# Altium PCB ACDC.PcbDoc (part 1 of 2)
Units mil, origin at the board's own origin, x right, y up, seen from the top; angles counter-clockwise.
Board outline 4750 x 3251 mil, 4 copper layers (Top Layer, GND, 3V3, Bottom Layer), stack 23.756 mil thick; 141 components, 109 nets, 697 pads, 528 vias.
Unrouted connection lines stored in the file: 62.
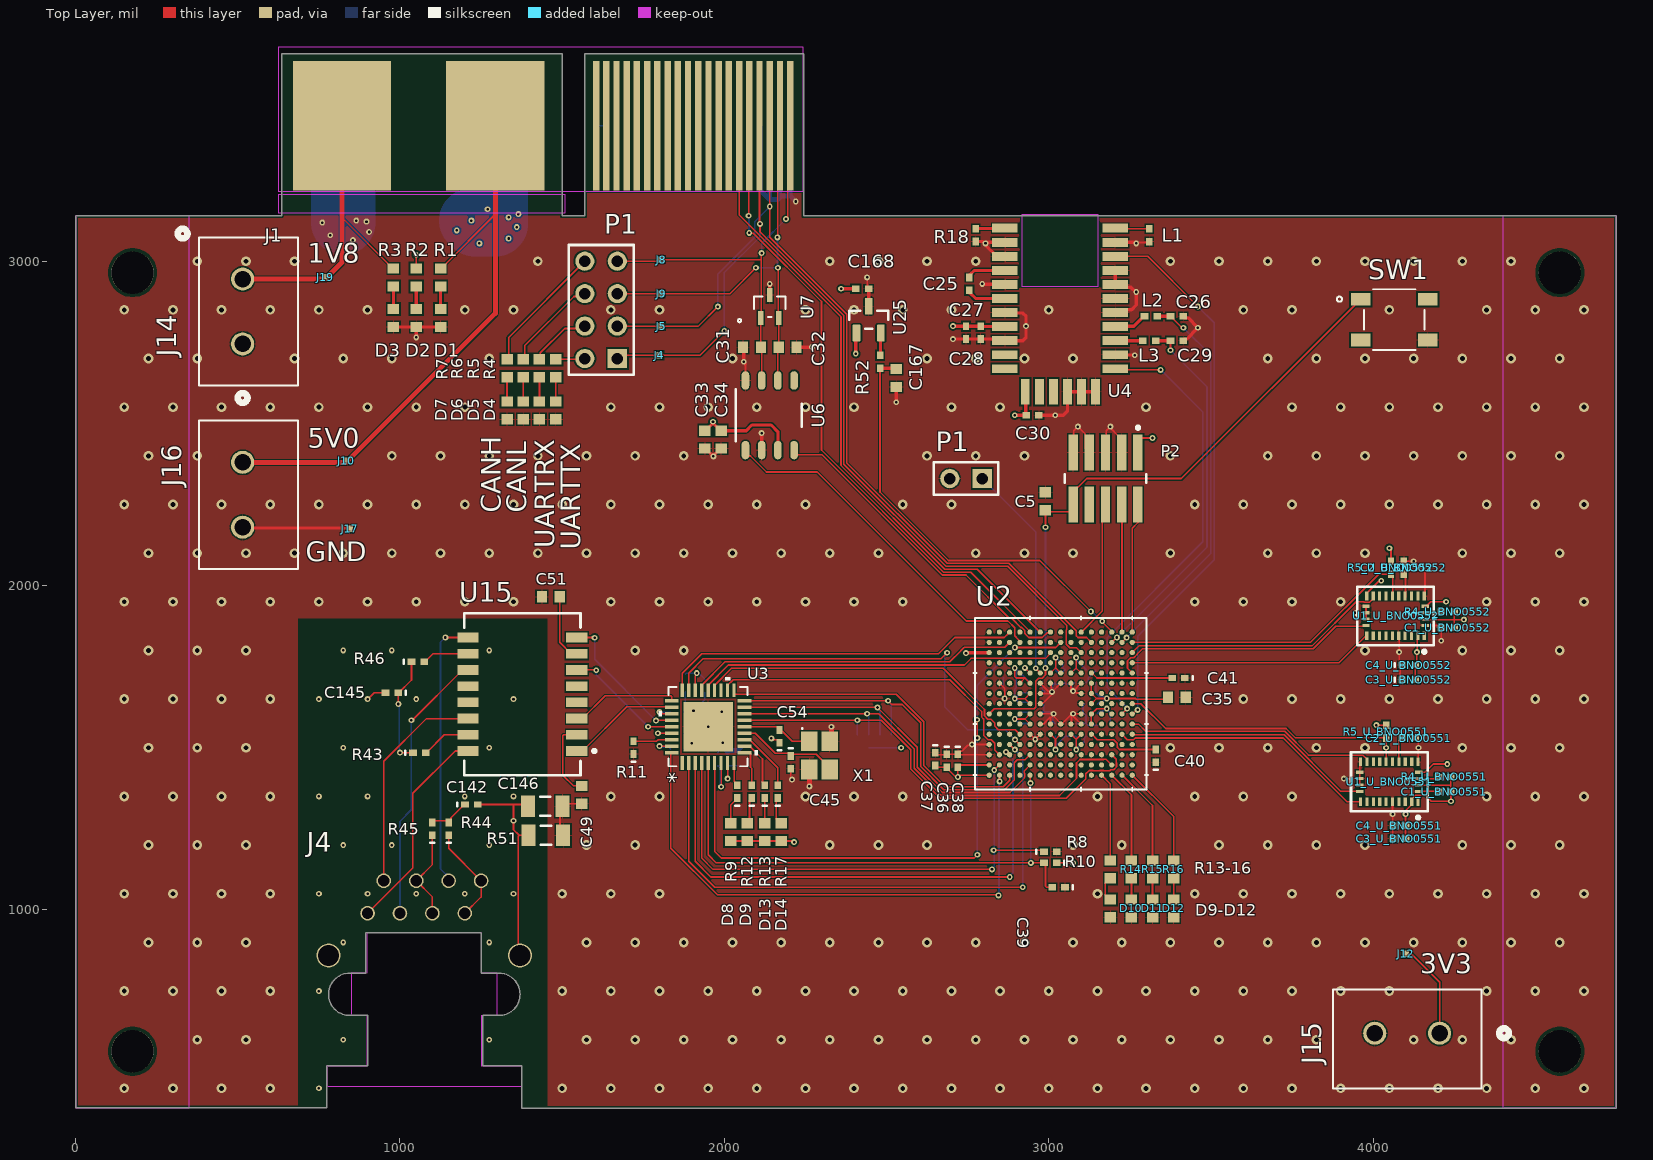
[diagram p0: Top Layer view]
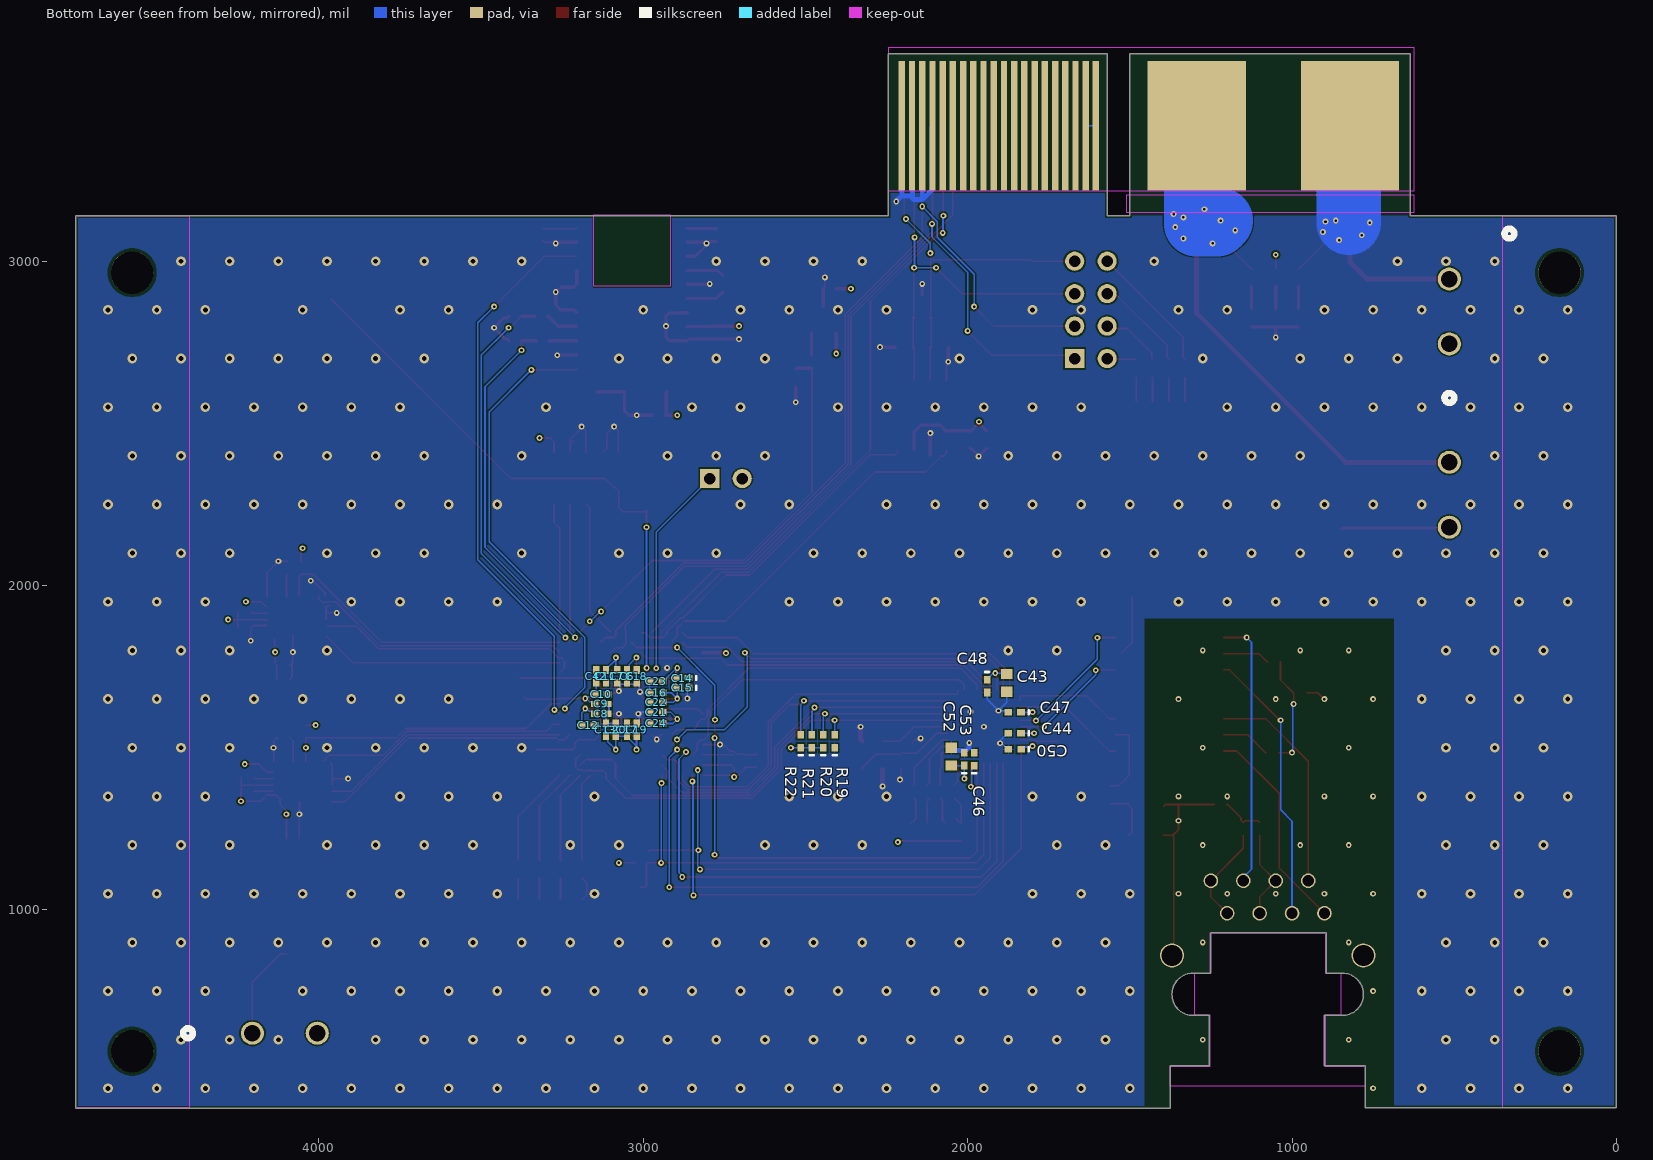
[diagram p1: Bottom Layer view, seen from below]
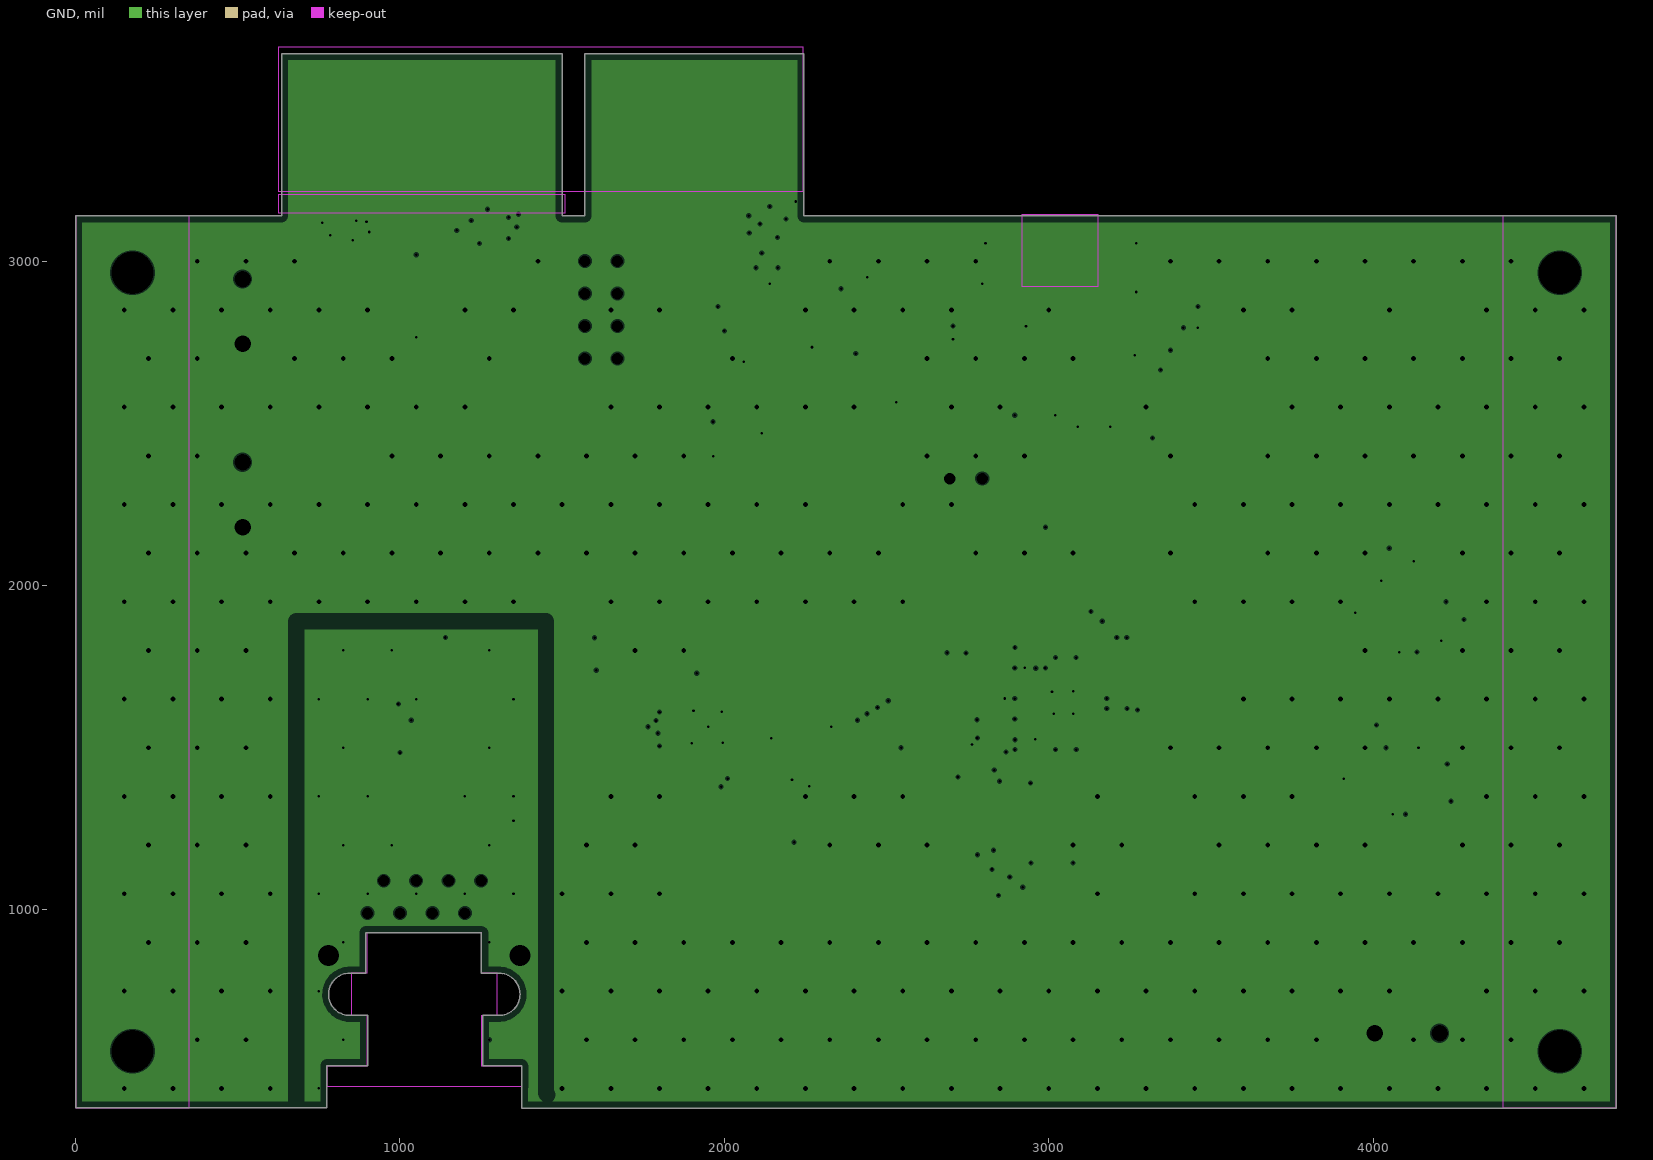
[diagram p2: GND, clearances drawn from the general rule]
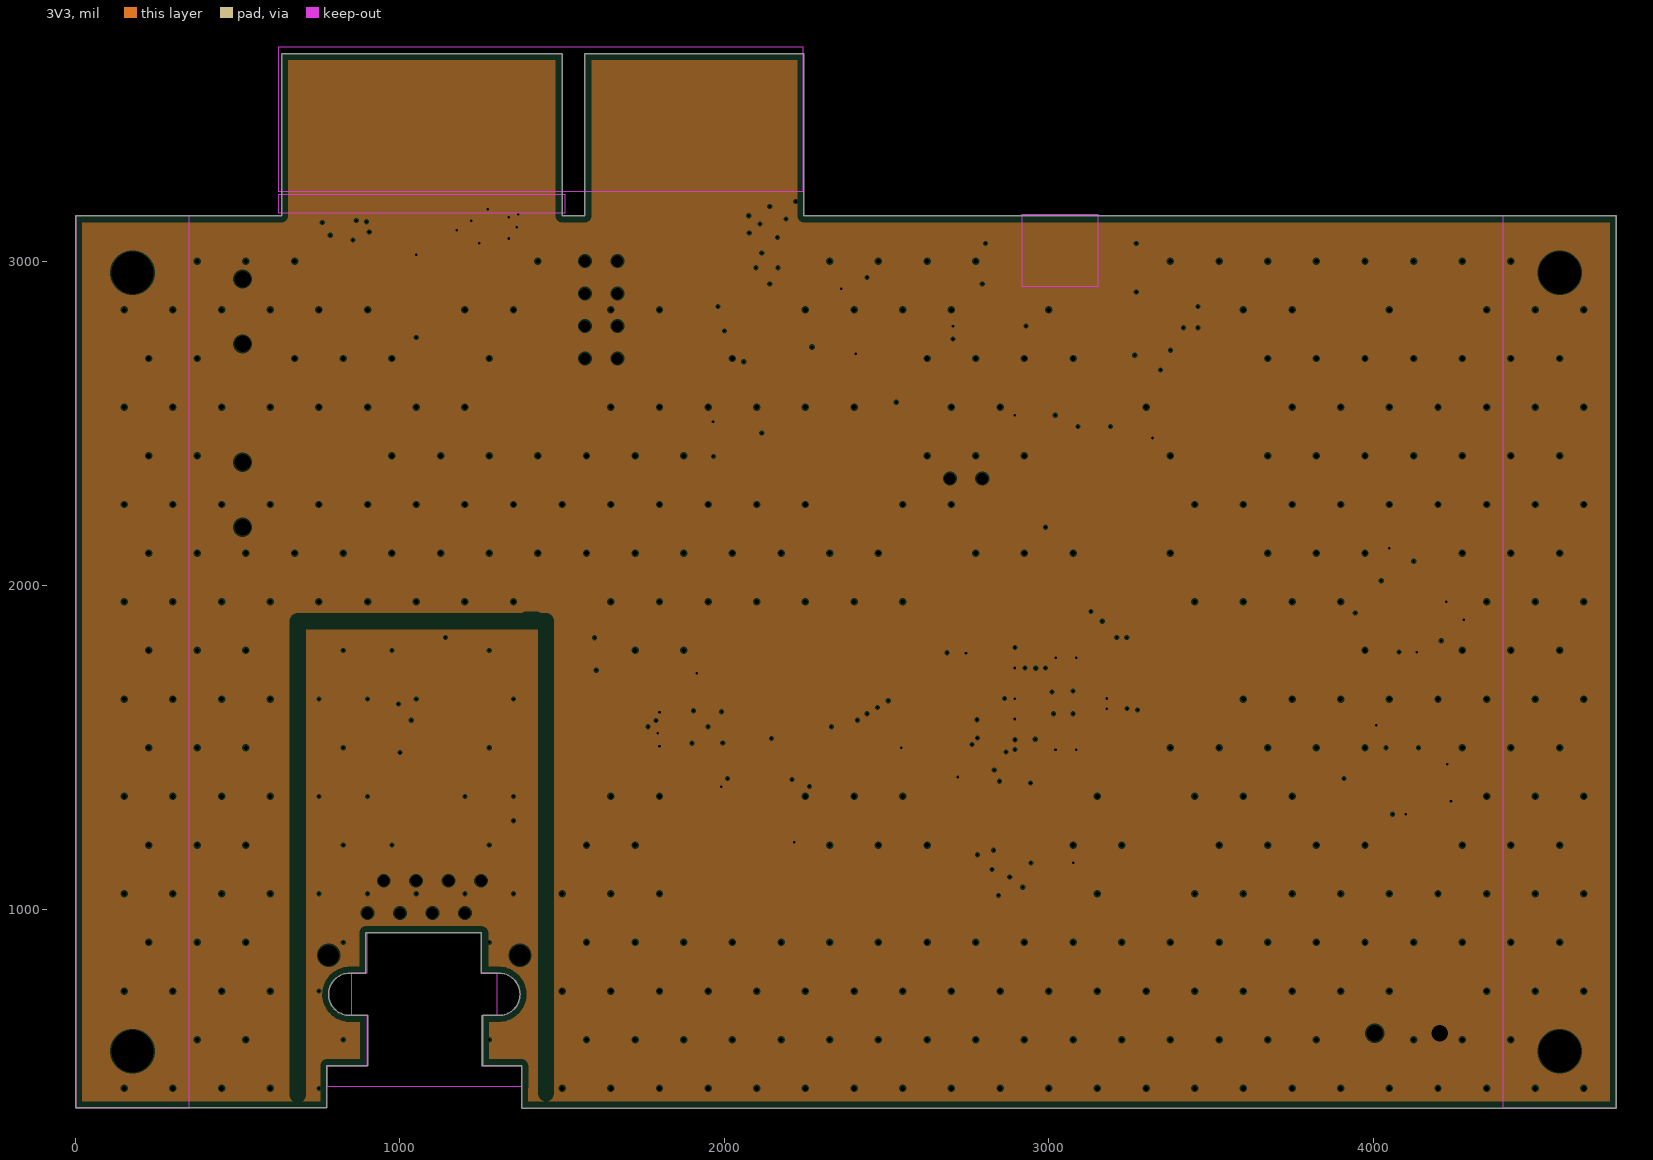
[diagram p3: 3V3, clearances drawn from the general rule]

## Layer stack, top to bottom
Top Solder: solder mask 0.4, Solder Resist, Dk 3.5
Top Layer: signal copper 1.4
Dielectric 2: prepreg 2.8, PP-006, Dk 4.1
GND: plane copper 1.378, net (Multiple Nets)
Dielectric 1: dielectric 12.6, FR-4, Dk 4.8
3V3: plane copper 1.378, net 3V3
Dielectric 3: prepreg 2.8, PP-006, Dk 4.1
Bottom Layer: signal copper 1.4
Bottom Solder: solder mask 0.4, Solder Resist, Dk 3.5

## Board outline
0,390 775,390 775,520 900,520 900,675 845,675 cw(c844.91,740.1) 850,805 895,805 895,930 1250,930 1250,805 1300,805 cw(c1305,740) 1300,675 1255,675 1255,520 1375,520 1375,390 1376,389 4749,389 4750,390 4750,3140 2245,3140 2245,3640 1570,3640 1570,3140 1500,3140 1500,3640 635,3640 635,3140 0,3140

## Design rules (kind name [scope] priority, off if disabled: settings)
BoardOutlineClearance [All] p1: gap=7.87 ignorepadtopadclearanceinfootprint=FALSE
Clearance [All] p1: gap=5 ignorepadtopadclearanceinfootprint=FALSE except(4: Arc-Arc Arc-Track Arc-SMDPad Arc-THPad Arc-Fill Arc-Poly Arc-Region Arc-Text Track-Track Track-SMDPad Track-THPad Track-Fill Track-Poly Track-Region Track-Text SMDPad-Text THPad-Text Fill-Text Poly-Text Region-Text Text-Text; 9.84: Arc-Hole Track-Hole SMDPad-Hole THPad-Hole Via-Hole Fill-Hole Poly-Hole Region-Hole Text-Hole)
ComponentClearance [All] p1: gap=4 collisioncheckmode=3 verticalgap=4 showdistances=TRUE
DiffPairsRouting [All] p1: maxlimit=4 minlimit=4 mostfreqgap=4 substack1={5B3CBE88-527F-45CC-934D-B3D730501180} toplayer_{5b3cbe88-527f-45cc-934d-b3d730501180}_minwidth=15 toplayer_{5b3cbe88-527f-45cc-934d-b3d730501180}_maxwidth=15 toplayer_{5b3cbe88-527f-45cc-934d-b3d730501180}_prefwidth=15 bottomlayer_{5b3cbe88-527f-45cc-934d-b3d730501180}_minwidth=15 bottomlayer_{5b3cbe88-527f-45cc-934d-b3d730501180}_maxwidth=15 bottomlayer_{5b3cbe88-527f-45cc-934d-b3d730501180}_prefwidth=15 toplayer_minwidth=4 toplayer_maxwidth=71497.94 toplayer_prefwidth=4 bottomlayer_minwidth=4 bottomlayer_maxwidth=71497.94 bottomlayer_prefwidth=4 substack2={8099F0E5-E8A4-4C0B-B981-DA392BF8B1DC} toplayer_{8099f0e5-e8a4-4c0b-b981-da392bf8b1dc}_minwidth=15 toplayer_{8099f0e5-e8a4-4c0b-b981-da392bf8b1dc}_maxwidth=15 toplayer_{8099f0e5-e8a4-4c0b-b981-da392bf8b1dc}_prefwidth=15 bottomlayer_{8099f0e5-e8a4-4c0b-b981-da392bf8b1dc}_minwidth=15 bottomlayer_{8099f0e5-e8a4-4c0b-b981-da392bf8b1dc}_maxwidth=15 bottomlayer_{8099f0e5-e8a4-4c0b-b981-da392bf8b1dc}_prefwidth=15 substack3={670BDCB0-0926-4304-8001-FDB9BD357462} toplayer_{670bdcb0-0926-4304-8001-fdb9bd357462}_minwidth=15 toplayer_{670bdcb0-0926-4304-8001-fdb9bd357462}_maxwidth=15 toplayer_{670bdcb0-0926-4304-8001-fdb9bd357462}_prefwidth=15 bottomlayer_{670bdcb0-0926-4304-8001-fdb9bd357462}_minwidth=15 bottomlayer_{670bdcb0-0926-4304-8001-fdb9bd357462}_maxwidth=15 bottomlayer_{670bdcb0-0926-4304-8001-fdb9bd357462}_prefwidth=15 substack4={A201DB0F-6F31-4885-A301-8523EAE111D3} toplayer_{a201db0f-6f31-4885-a301-8523eae111d3}_minwidth=15 toplayer_{a201db0f-6f31-4885-a301-8523eae111d3}_maxwidth=15 toplayer_{a201db0f-6f31-4885-a301-8523eae111d3}_prefwidth=15 bottomlayer_{a201db0f-6f31-4885-a301-8523eae111d3}_minwidth=15 bottomlayer_{a201db0f-6f31-4885-a301-8523eae111d3}_maxwidth=15 bottomlayer_{a201db0f-6f31-4885-a301-8523eae111d3}_prefwidth=15 maxuncoupledlength=500
Height [All] p1: minheight=0 maxheight=71497.94 prefheight=500
HoleSize [All] p1: absolutevalues=TRUE maxlimit=248.03 minlimit=7.87 maxpercent=80.000 minpercent=20.000
HoleToHoleClearance [All] p1: gap=9.84 allowstackedmicrovias=FALSE
MinimumAnnularRing [All] p1: minimumring=3
MinimumSolderMaskSliver [All] p1: minsoldermaskwidth=0
PlaneClearance [All] p1: clearance=4
PlaneConnect PlaneConnectPowerPads [InPadClass('PowerPads')] p1: planeconnectstyle=Direct reliefexpansion=20 reliefentries=4 reliefconductorwidth=10 reliefairgap=10
PlaneConnect [All] p2: pad.planeconnectstyle=Relief pad.reliefexpansion=11.81 pad.reliefentries=4 pad.reliefconductorwidth=4 pad.reliefairgap=4 via.planeconnectstyle=Direct via.reliefexpansion=11.81 via.reliefentries=4 via.reliefconductorwidth=5 via.reliefairgap=5
PolygonConnect PolygonConnectPowerPads [All vs (InPadClass('PowerPads'))] p1: connectstyle=Direct reliefconductorwidth=10 reliefentries=4 polygonreliefangle="90 Angle" airgapwidth=10
PolygonConnect [All] p2: thpad.connectstyle=Relief thpad.reliefconductorwidth=4 thpad.reliefentries=4 thpad.polygonreliefangle="90 Angle" thpad.airgapwidth=4 smdpad.connectstyle=Relief smdpad.reliefconductorwidth=4 smdpad.reliefentries=4 smdpad.polygonreliefangle="90 Angle" smdpad.airgapwidth=4 via.connectstyle=Direct via.reliefconductorwidth=5 via.reliefentries=4 via.polygonreliefangle="90 Angle" via.airgapwidth=5
RoutingVias [All] p1: holewidth=7.87 width=17.72 viastyle="Through Hole" minholewidth=7.87 minwidth=17.72 maxholewidth=248.03 maxwidth=257.87
SilkToSilkClearance [All] p1: silktosilkclearance=0
SilkToSolderMaskClearance [IsPad] p1: minsilkscreentomaskgap=4 clearancetoexposedcopper=TRUE
SolderMaskExpansion [All] p1: expansion=2.95 istentingtop=FALSE
Width [All] p1: maxlimit=71497.94 minlimit=4 preferedwidth=4 substack1={5B3CBE88-527F-45CC-934D-B3D730501180} substack2={8099F0E5-E8A4-4C0B-B981-DA392BF8B1DC} substack3={670BDCB0-0926-4304-8001-FDB9BD357462} substack4={A201DB0F-6F31-4885-A301-8523EAE111D3}
20 further rules are at their usual default settings.

## Classes and differential pairs
net class TXD[3..0]: TXD0 TXD1 TXD2 TXD3
net class RXD[3..0]: RXD0 RXD1 RXD2 RXD3
channel class BNO055: U_BNO0551 U_BNO0552
component class U_BNO0552: C1_U_BNO0552 C2_U_BNO0552 C3_U_BNO0552 C4_U_BNO0552 R4_U_BNO0552 R5_U_BNO0552 U1_U_BNO0552
component class U_BNO0551: C1_U_BNO0551 C2_U_BNO0551 C3_U_BNO0551 C4_U_BNO0551 R4_U_BNO0551 R5_U_BNO0551 U1_U_BNO0551
component class Designator: C5 C6 C7 C8 C9 C10 C11 C12 C13 C14 C15 C16 C17 C18 C19 C20 C21 C22 C23 C24 C35 C36 C37 C38 C40 C41 C42 D9-D12 D10 D11 D12 P1 P2 R13-16 R14 R15 R16 SW1 U2

## Components (designator, comment, footprint, x,y, rotation, side; value= is the part's Value field where it differs from the comment)
C1_U_BNO0551 "Cap" 0402-A 4220,1365 r0 top value=100nF (schematic designator C1)
C1_U_BNO0552 "Cap" 0402-A 4230,1870 r0 top value=100nF (schematic designator C1)
C2_U_BNO0551 "Cap" 0402-A 4110,1530 r180 top value=100nF (schematic designator C2)
C2_U_BNO0552 "Cap" 0402-A 4095,2055 r270 top value=100nF (schematic designator C2)
C3_U_BNO0551 "Cap" 0402-A 4080,1220 r0 top value=100nF (schematic designator C3)
C3_U_BNO0552 "Cap" 0402-A 4110,1710 r0 top value=100nF (schematic designator C3)
C4_U_BNO0551 "Cap" 0402-A 4080,1260 r0 top value=6.8nF (schematic designator C4)
C4_U_BNO0552 "Cap" 0402-A 4110,1755 r0 top value=6.8nF (schematic designator C4)
C5 "Cap" 1608[0603] 2990,2260 r270 top value=100nF
C6 "Cap" 0402-A 3050,1720 r90 bottom value=100nF
C7 "Cap" 0402-A 3080,1720 r90 bottom value=100nF
C8 "Cap" 0402-A 3129.68,1605 r0 bottom value=100nF
C9 "Cap" 0402-A 3130,1635 r0 bottom value=100nF
C10 "Cap" 0402-A 3130,1665 r0 bottom value=100nF
C11 "Cap" 0402-A 3115,1720 r90 bottom value=100nF
C12 "Cap" 0402-A 3170,1570 r0 bottom value=100nF
C13 "Cap" 0402-A 3115,1555 r270 bottom value=100nF
C14 "Cap" 0402-A 2880.31,1715 r0 bottom value=100nF
C15 "Cap" 0402-A 2879.68,1685 r0 bottom value=100nF
C16 "Cap" 0402-A 2960,1670 r180 bottom value=100nF
C17 "Cap" 0402-A 3050,1555.32 r270 bottom value=100nF
C18 "Cap" 0402-A 3020,1720 r90 bottom value=100nF
C19 "Cap" 0402-A 3020,1555 r270 bottom value=100nF
C20 "Cap" 0402-A 3085,1555.32 r270 bottom value=100nF
C21 "Cap" 0402-A 2960,1610 r180 bottom value=100nF
C22 "Cap" 0402-A 2960,1640 r180 bottom value=100nF
C23 "Cap" 0402-A 2960.32,1705 r180 bottom value=100nF
C24 "Cap" 0402-A 2960,1575 r180 bottom value=100nF
C25 "Cap" 0402-A 2755,2930 r90 top value=22pF
C26 "Cap" 0402-A 3395,2830 r180 top value=22pF
C27 "Cap" 0402-A 2745,2780 r90 top value=22pF
C28 "Cap" 0402-A 2790,2780 r90 top value=2.2uF
C29 "Cap" 0402-A 3395,2755 r180 top value=22pF
C30 "Cap" 0402-A 2950,2525 r180 top value=22pF
C31 "Cap" 1608[0603] 2085,2735 r0 top value=100nF
C32 "Cap" 1608[0603] 2195,2735 r180 top value=100nF
C33 "Cap" 1608[0603] 1940,2450 r270 top value=100nF
C34 "Cap" 1608[0603] 1990,2450 r90 top value=1nF
C35 "Cap" 1608[0603] 3395,1655 r180 top value=4.7uF
C36 "Cap" 0402-A 2685,1460 r270 top value=100nF
C37 "Cap" 0402-A 2650,1465 r270 top value=1uF
C38 "Cap" 0402-A 2720,1460 r270 top value=100nF
C39 "Cap" 0402-A 3030.63,1070 r180 top value=100nF
C40 "Cap" 0402-A 3330,1475 r90 top value=2.2uF
C41 "Cap" 0402-A 3400,1715 r180 top value=2.2uF
C42 "Cap" 0402-A 3145,1720 r270 bottom value=100nF
C43 "Cap" 1608[0603] 1880,1700 r270 bottom value=4.7uF
C44 "Cap" 0402-A 1855,1545 r0 bottom value=100nF
C45 "Cap" 0402-A 2205,1455 r270 top value=33pF
C46 "Cap" 0402-A 1980,1464.68 r90 bottom value=100nF
C47 "Cap" 0402-A 1855,1610 r0 bottom value=100nF
C48 "Cap" 0402-A 1940,1690.32 r270 bottom value=100nF
C49 "Cap" 1608[0603] 1560,1355 r270 top value=100nF
C50 "Cap" 0402-A 1854.68,1495 r0 bottom value=100nF
C51 "Cap" 1608[0603] 1465,1965 r180 top value=100nF
C52 "Cap" 1608[0603] 2050,1472.56 r90 bottom value=4.7uF
C53 "Cap" 0402-A 2010,1465 r90 bottom value=100nF
C54 "Cap" 0402-A 2170,1535.31 r90 top value=33pF
C142 "Cap" 0402-A 1220,1325 r0 top value=10nF
C145 "Cap" 0402-A 975,1670 r180 top value=1nF
C146 "Cap" C1206 1448.15,1320 r180 top value=4.7nF
C167 "Cap" 1608[0603] 2530,2640 r270 top value=680pF
C168 "Cap" 0402-A 2425,2915 r0 top value=100nF
D1 "LED0" 1608[0603] 1125,2825 r270 top
D2 "LED0" 1608[0603] 1050,2825 r270 top
D3 "LED0" 1608[0603] 980,2825 r270 top
D4 "LED0" 1608[0603] 1480,2540 r270 top
D5 "LED0" 1608[0603] 1430,2540 r270 top
D6 "LED0" 1608[0603] 1380,2540 r270 top
D7 "LED0" 1608[0603] 1330,2540 r270 top
D8 "LED0" 1608[0603] 2020,1240 r90 top
D9 "LED0" 1608[0603] 2070,1240 r90 top
D9-D12 "LED0" 1608[0603] 3190,1005 r270 top
D10 "LED0" 1608[0603] 3255,1005 r270 top
D11 "LED0" 1608[0603] 3320,1005 r270 top
D12 "LED0" 1608[0603] 3385,1005 r270 top
D13 "LED0" 1608[0603] 2125,1240 r90 top
D14 "LED0" 1608[0603] 2175,1240 r90 top
J1 "HSEC8-120-01-L-PV-4-1" "HSEC8-120-01-L-PV-4-1 Gold Fingers" 1450,3435 r0 top
J4 "5029" "EXPOSED PAD 0.02X0.02" 1800,2710 r0 top
J4 "RJULE4218201" RJULE4218201 1075,740 r0 top locked
J5 "5029" "EXPOSED PAD 0.02X0.02" 1805,2800 r0 top
J8 "5029" "EXPOSED PAD 0.02X0.02" 1805,3005 r0 top
J9 "5029" "EXPOSED PAD 0.02X0.02" 1805,2900 r0 top
J10 "5029" "EXPOSED PAD 0.02X0.02" 835,2385 r90 top
J12 "5029" "EXPOSED PAD 0.02X0.02" 4100,865 r90 top
J14 "OSTTC022162" CONN_OSTTC022162_OST 515,2945 r270 top
J15 "OSTTC022162" CONN_OSTTC022162_OST 4205,620 r180 top
J16 "OSTTC022162" CONN_OSTTC022162_OST 515,2380 r270 top
J17 "5029" "EXPOSED PAD 0.02X0.02" 845,2175 r90 top
J19 "5029" "EXPOSED PAD 0.02X0.02" 770,2950 r90 top
L1 "Inductor" 0402-A 3310,3080 r270 top value=1.8nH
L2 "Inductor" 0402-A 3315,2830 r0 top value=47nH
L3 "Inductor" 0402-A 3310,2755 r0 top value=47nH
P1 "Header 4X2" HDR2X4 1670,2700 r90 top
P1 "Header 2" HDR1X2 2795,2330 r180 top
P2 "SWD" SMTC-FTSH-105-01-L-DV-K_V 3175,2330.12 r180 top locked
R1 "Res1" 1608[0603] 1125,2950 r90 top value=470
R2 "Res1" 1608[0603] 1050,2950 r90 top value=470
R3 "Res1" 1608[0603] 980,2950 r90 top value=470
R4 "Res1" 1608[0603] 1480,2670 r90 top value=470
R4_U_BNO0551 "Res1" 0402-A 4220,1410 r180 top value=10k (schematic designator R4)
R4_U_BNO0552 "Res1" 0402-A 4230,1920 r180 top value=10k (schematic designator R4)
R5 "Res1" 1608[0603] 1430,2670 r90 top value=470
R5_U_BNO0551 "Res1" 0402-A 4040,1550 r90 top value=10k (schematic designator R5)
R5_U_BNO0552 "Res1" 0402-A 4055,2055 r90 top value=10k (schematic designator R5)
R6 "Res1" 1608[0603] 1380,2670 r90 top value=470
R7 "Res1" 1608[0603] 1330,2670 r90 top value=470
R8 "Res1" 0402-A 3005.31,1180 r0 top value=1k
R9 "Res1" 0402-A 2040,1365 r90 top value=220
R10 "Res1" 0402-A 3005,1145 r180 top value=10k
R11 "Res1" 0402-A 1720,1500.31 r90 top value=12.4k
R12 "Res1" 0402-A 2085,1365 r90 top value=220
R13 "Res1" 0402-A 2125,1365 r90 top value=220
R13-16 "Res1" 1608[0603] 3190,1125 r90 top value=470
R14 "Res1" 1608[0603] 3255,1125 r90 top value=470
R15 "Res1" 1608[0603] 3320,1125 r90 top value=470
R16 "Res1" 1608[0603] 3385,1125 r90 top value=470
R17 "Res1" 0402-A 2165,1365 r90 top value=220
R18 "Res1" 0402-A 2775,3080.31 r90 top value=0
R19 "Res1" 0402-A 2410,1520 r90 bottom value=10k
R20 "Res1" 0402-A 2445,1520 r90 bottom value=10k
R21 "Res1" 0402-A 2480,1520 r90 bottom value=10k
R22 "Res1" 0402-A 2515,1520 r90 bottom value=10k
R43 "Res1" 0402-A 1060,1485 r0 top value=75
R44 "Res1" 0402-A 1150,1250 r90 top value=75
R45 "Res1" 0402-A 1100,1250 r90 top value=75
R46 "Res1" 0402-A 1055.31,1765 r0 top value=75
R51 "Res1" C1206 1450,1230 r0 top value=1M
R52 "Res1" 0402-A 2480,2690 r270 top value=0
SW1 "PTS647SK38SMTR2LFS" PTS647SK38SMTR2LFS_CNK 4065,2820 r0 top
U1_U_BNO0551 "BNO055" FP-BNO055-MFG 4050,1395 r270 top (schematic designator U1)
U1_U_BNO0552 "BNO055" FP-BNO055-MFG 4069.21,1906.52 r270 top (schematic designator U1)
U2 "STM32F750N8H6" TFBGA216_13X13_STM 3037.01,1635.98 r0 top locked
U3 "LAN8700C-AEZG-TR" QFN36_6X6MC_MCH 1950,1565 r90 top locked
U4 "M20048-1" M20048-1 2927.6,2597.52 r0 top locked
U6 "TCAN334DR" D0008A_N 2140,2525 r90 top value=Value
U7 "D5V0L2B3W-7" SOT-323_DIO 2140,2860 r0 top
U15 "HX1188FNL" PULS-HX1188FNL-SMT-16_V 1377.52,1665 r90 top locked
U25 "TMP235AQDBZTQ1" FP-DBZ0003A-MFG 2445,2820 r90 top
X1 "25M20P2/XT324-10/10" 25M20P2/XT324-10/10 2293.5,1476.69 r270 top

## Footprints (in the part's own frame and the unit in brackets; to place one, negate y for a bottom-side part, rotate by r counter-clockwise, add the part's x,y. Pads: shape width x height; smd on the part's side, far side on the other; paste and mask are expansions set on the pad)
25M20P2/XT324-10/10 [mm] "DFN, 4-Leads, Body 3.20x2.50mm, Pitch 1.60mm, IPC Medium Density"
  rect 1.55x1.3 smd: 1(-1.1,-0.8) 2(1.1,-0.8) 3(1.1,0.8) 4(-1.1,0.8)
  silkscreen extent -2.15,-1.4 -2.05,-1.3, body extent -1.7,-1.35 1.7,1.35, height 0.7
0402-A [mm] "Chip Inductor, Body 1.0x0.5mm, IPC High Density"
  rect 0.6x0.5 smd: 1(-0.5,0) 2(0.5,0)
  body extent -0.55,-0.3 0.55,0.3, height 0.55
1608[0603] [mm] "Chip Capacitor, Body 1.6x0.8mm, IPC High Density"
  rect 0.8x0.9 smd: 1(-0.7,0) 2(0.7,0)
  body extent -0.87,-0.48 0.87,0.48, height 1.3
C1206 [mm] "Chip Capacitor, Body 3.2x1.6mm, IPC High Density"
  rect 1.1x1.7 smd: 1(-1.35,0) 2(1.35,0)
  silkscreen extent -0.4,-0.75 0.4,0.75, body extent -1.7,-0.9 1.7,0.9, height 1.3
CONN_OSTTC022162_OST [mil]
  round 71 hole 51 mask+0: 1(0,0) 2(200,0)
  silkscreen extent -155,-200 328,170, body extent 0,0 10,10, height 10
D0008A_N [mm]
  oval 1.45x0.6 smd paste+0 mask+0.051: 1(-2.725,1.905) 2(-2.725,0.635) 3(-2.725,-0.635) 4(-2.725,-1.905) 5(2.725,-1.905) 6(2.725,-0.635) 7(2.725,0.635) 8(2.725,1.905)
  silkscreen extent -2.04,-2.5 2.03,2.67, body extent 0,0 0.25,0.25, height 0.25
"EXPOSED PAD 0.02X0.02" [mil]
  rect 20x20 smd: 1(0,0)
FP-BNO055-MFG [mm]
  rect 0.675x0.25 smd paste+0 mask+0: 1(1.562,2.25) 6(-1.562,2.25) 7(-1.562,1.75) 8(-1.562,1.25) 9(-1.562,0.75) 10(-1.562,0.25) 11(-1.562,-0.25) 12(-1.562,-0.75) 13(-1.562,-1.25) 14(-1.562,-1.75) 15(-1.562,-2.25) 20(1.562,-2.25) 21(1.562,-1.75) 22(1.562,-1.25) 23(1.562,-0.75) 24(1.562,-0.25) 25(1.562,0.25) 26(1.562,0.75) 27(1.562,1.25) 28(1.562,1.75)
  rect 0.25x0.575 smd paste+0 mask+0: 2(0.75,2.312) 3(0.25,2.312) 4(-0.25,2.312) 5(-0.75,2.312) 16(-0.75,-2.312) 17(-0.25,-2.312) 18(0.25,-2.312) 19(0.75,-2.312)
  silkscreen extent -2.3,-3 2.92,3
FP-DBZ0003A-MFG [mm]
  rrect17% 1.3x0.6 smd paste+0 mask+0: 1(-1.05,0.95) 2(-1.05,-0.95) 3(1.05,0)
  silkscreen extent -0.7,-1.52 0.7,1.52, body extent -1.8,-1.62 1.8,1.62, height 0.25
HDR1X2 [mm] "Connector; Header; 2 Position"
  rect 1.5x1.5 hole 0.9: 1(0,0)
  round 1.5 hole 0.9: 2(2.54,0)
  silkscreen extent -1.27,-1.27 3.81,1.27
HDR2X4 [mm] "Connector; Header; 4x2 Position"
  rect 1.5x1.5 hole 0.9: 1(0,0)
  round 1.5 hole 0.9: 2(0,2.54) 3(2.54,0) 4(2.54,2.54) 5(5.08,0) 6(5.08,2.54) 7(7.62,0) 8(7.62,2.54)
  silkscreen extent -1.27,-1.27 8.89,3.81
"HSEC8-120-01-L-PV-4-1 Gold Fingers" [mil]
  rect 303x400 smd paste-400: 0(-629,-17.25) 1(-156,-17.25)
  rect 19.68x400 smd paste-400: 2(154.5,-17.25) 3(186,-17.25) 4(217.5,-17.25) 5(249,-17.25) 6(280.5,-17.25) 7(312,-17.25) 8(343.5,-17.25) 9(375,-17.25) 10(406.5,-17.25) 11(438,-17.25) 12(469.5,-17.25) 13(501,-17.25) 14(532.5,-17.25) 15(564,-17.25) 16(595.5,-17.25) 17(627,-17.25) 18(658.5,-17.25) 19(690,-17.25) 20(721.5,-17.25) 21(753,-17.25)
  rect 303x400 smd far side paste-400: 22(-629,-17.25) 23(-156,-17.25)
  rect 19.68x400 smd far side paste-400: 24(154.5,-17.25) 25(186,-17.25) 26(217.5,-17.25) 27(249,-17.25) 28(280.5,-17.25) 29(312,-17.25) 30(343.5,-17.25) 31(375,-17.25) 32(406.5,-17.25) 33(438,-17.25) 34(469.5,-17.25) 35(501,-17.25) 36(532.5,-17.25) 37(564,-17.25) 38(595.5,-17.25) 39(627,-17.25) 40(658.5,-17.25) 41(690,-17.25) 42(721.5,-17.25) 43(753,-17.25)
  Keep-Out Layer region: -825,-220 792.61,-220 792.61,225 -825,225
  Keep-Out Layer region: -825,-285 60,-285 60,-230 -825,-230
M20048-1 [mm]
  rect 2x0.7 smd: 1(-1.59,12.806) 2(-1.59,11.704) 3(-1.59,10.604) 4(-1.59,9.504) 5(-1.59,8.4) 6(-1.59,7.302) 7(-1.59,6.202) 8(-1.59,5.1) 9(-1.59,4) 10(-1.59,2.9) 11(-1.59,1.8) 18(7.05,1.8) 19(7.05,2.9) 20(7.05,4) 21(7.05,5.1) 22(7.05,6.202) 23(7.05,7.302) 24(7.05,8.4) 25(7.05,9.504) 26(7.05,10.604) 27(7.05,11.704) 28(7.05,12.806)
  rect 0.7x2 smd: 12(0,0) 13(1.1,0) 14(2.2,0) 15(3.3,0) 16(4.4,0) 17(5.5,0)
  Keep-Out Layer region: -0.285,8.255 5.715,8.255 5.715,13.843 -0.285,13.843
PTS647SK38SMTR2LFS_CNK [mil]
  rect 61x39 smd paste+0 mask+0: 1(-103.35,62.99) 2(103.35,62.99) 3(-103.35,-62.99) 4(103.35,-62.99)
  silkscreen extent -177,-94 94,94, body extent 0,0 10,10, height 10
PULS-HX1188FNL-SMT-16_V [mm] "SMD, 16-Leads, Body 12.7x9.09mm, Pitch 1.27mm"
  rect 0.76x1.65 smd: 1(-4.445,-4.255) 2(-3.175,-4.255) 3(-1.905,-4.255) 4(-0.635,-4.255) 5(0.635,-4.255) 6(1.905,-4.255) 7(3.175,-4.255) 8(4.445,-4.255) 9(4.445,4.255) 10(3.175,4.255) 11(1.905,4.255) 12(0.635,4.255) 13(-0.635,4.255) 14(-1.905,4.255) 15(-3.175,4.255) 16(-4.445,4.255)
  silkscreen extent -6.35,-5.75 6.35,4.54, body extent -6.35,-4.54 6.35,4.54, height 5.99
QFN36_6X6MC_MCH [mil]
  rect 42x10 smd paste+0 mask+0: 1(-112,80) 2(-112,60) 3(-112,40) 4(-112,20) 5(-112,0) 6(-112,-20) 7(-112,-40) 8(-112,-60) 9(-112,-80) 19(112,-80) 20(112,-60) 21(112,-40) 22(112,-20) 23(112,0) 24(112,20) 25(112,40) 26(112,60) 27(112,80)
  rect 10x42 smd paste+0 mask+0: 10(-80,-112) 11(-60,-112) 12(-40,-112) 13(-20,-112) 14(0,-112) 15(20,-112) 16(40,-112) 17(60,-112) 18(80,-112) 28(80,112) 29(60,112) 30(40,112) 31(20,112) 32(0,112) 33(-20,112) 34(-40,112) 35(-60,112) 36(-80,112)
  rect 152x152 smd paste-75.5 mask-75.5: 37(0,0)
  silkscreen extent -122,-153 153,153, body extent 0,0 10,10, height 10
RJULE4218201 [mil]
  round 45 hole 35: 1(-175,250) 2(-125,350) 3(-75,250) 4(-25,350) 5(25,250) 6(75,350) 7(125,250) 8(175,350)
  round 74 hole 64: 9(-295,120) 10(295,120)
  round 74 on Mech7: 11(-225,0) 11(225,0)
  Keep-Out Layer board cut-out: -177.5,189 -177.5,65 -225,65 -225,-65 -177.5,-65 -177.5,-222 -300.5,-222 -300.5,-284 300.5,-284 300.5,-222 177.5,-222 177.5,-65 225,-65 225,65 177.5,65 177.5,189
  body extent -372,-348 372,410, height 376
SMTC-FTSH-105-01-L-DV-K_V [mm] "CONN, 10-Leads, Body 6.35x3.43mm, Pitch 1.27mm"
  rect 0.74x2.79 smd: 1(-2.54,-2.035) 2(-2.54,2.035) 3(-1.27,-2.035) 4(-1.27,2.035) 5(0,-2.035) 6(0,2.035) 7(1.27,-2.035) 8(1.27,2.035) 9(2.54,-2.035) 10(2.54,2.035)
  silkscreen extent -3.17,-4.1 3.17,0.34, body extent -3.17,-2.92 3.18,2.92, height 6.12
SOT-323_DIO [mm]
  rect 0.451x1.111 smd paste+0 mask+0: 1(-0.7,-0.9) 2(0.7,-0.9) 3(0,0.9)
  silkscreen extent -2.5,-1.23 1.23,0.8, body extent 0,0 0.25,0.25, height 0.25
TFBGA216_13X13_STM [mil]
  round 16 smd paste+0 mask+0: A1(-220.47,220.47) A2(-188.98,220.47) A3(-157.48,220.47) A4(-125.98,220.47) A5(-94.49,220.47) A6(-62.99,220.47) A7(-31.5,220.47) A8(0,220.47) A9(31.5,220.47) A10(62.99,220.47) A11(94.49,220.47) A12(125.98,220.47) A13(157.48,220.47) A14(188.98,220.47) A15(220.47,220.47) B1(-220.47,188.98) B2(-188.98,188.98) B3(-157.48,188.98) B4(-125.98,188.98) B5(-94.49,188.98) B6(-62.99,188.98) B7(-31.5,188.98) B8(0,188.98) B9(31.5,188.98) B10(62.99,188.98) B11(94.49,188.98) B12(125.98,188.98) B13(157.48,188.98) B14(188.98,188.98) B15(220.47,188.98) C1(-220.47,157.48) C2(-188.98,157.48) C3(-157.48,157.48) C4(-125.98,157.48) C5(-94.49,157.48) C6(-62.99,157.48) C7(-31.5,157.48) C8(0,157.48) C9(31.5,157.48) C10(62.99,157.48) C11(94.49,157.48) C12(125.98,157.48) C13(157.48,157.48) C14(188.98,157.48) C15(220.47,157.48) D1(-220.47,125.98) D2(-188.98,125.98) D3(-157.48,125.98) D4(-125.98,125.98) D5(-94.49,125.98) D6(-62.99,125.98) D7(-31.5,125.98) D8(0,125.98) D9(31.5,125.98) D10(62.99,125.98) D11(94.49,125.98) D12(125.98,125.98) D13(157.48,125.98) D14(188.98,125.98) D15(220.47,125.98) E1(-220.47,94.49) E2(-188.98,94.49) E3(-157.48,94.49) E4(-125.98,94.49) E5(-94.49,94.49) E6(-62.99,94.49) E7(-31.5,94.49) E8(0,94.49) E9(31.5,94.49) E10(62.99,94.49) E11(94.49,94.49) E12(125.98,94.49) E13(157.48,94.49) E14(188.98,94.49) E15(220.47,94.49) F1(-220.47,62.99) F2(-188.98,62.99) F3(-157.48,62.99) F4(-125.98,62.99) F5(-94.49,62.99) F6(-62.99,62.99) F7(-31.5,62.99) F8(0,62.99) F9(31.5,62.99) F10(62.99,62.99) F11(94.49,62.99) F12(125.98,62.99) F13(157.48,62.99) F14(188.98,62.99) F15(220.47,62.99) G1(-220.47,31.5) G2(-188.98,31.5) G3(-157.48,31.5) G4(-125.98,31.5) G5(-94.49,31.5) G6(-62.99,31.5) G10(62.99,31.5) G11(94.49,31.5) G12(125.98,31.5) G13(157.48,31.5) G14(188.98,31.5) G15(220.47,31.5) H1(-220.47,0) H2(-188.98,0) H3(-157.48,0) H4(-125.98,0) H5(-94.49,0) H6(-62.99,0) H10(62.99,0) H11(94.49,0) H12(125.98,0) H13(157.48,0) H14(188.98,0) H15(220.47,0) J1(-220.47,-31.5) J2(-188.98,-31.5) J3(-157.48,-31.5) J4(-125.98,-31.5) J5(-94.49,-31.5) J6(-62.99,-31.5) J10(62.99,-31.5) J11(94.49,-31.5) J12(125.98,-31.5) J13(157.48,-31.5) J14(188.98,-31.5) J15(220.47,-31.5) K1(-220.47,-62.99) K2(-188.98,-62.99) K3(-157.48,-62.99) K4(-125.98,-62.99) K5(-94.49,-62.99) K6(-62.99,-62.99) K7(-31.5,-62.99) K8(0,-62.99) K9(31.5,-62.99) K10(62.99,-62.99) K11(94.49,-62.99) K12(125.98,-62.99) K13(157.48,-62.99) K14(188.98,-62.99) K15(220.47,-62.99) L1(-220.47,-94.49) L2(-188.98,-94.49) L3(-157.48,-94.49) L4(-125.98,-94.49) L5(-94.49,-94.49) L6(-62.99,-94.49) L7(-31.5,-94.49) L8(0,-94.49) L9(31.5,-94.49) L10(62.99,-94.49) L11(94.49,-94.49) L12(125.98,-94.49) L13(157.48,-94.49) L14(188.98,-94.49) L15(220.47,-94.49) M1(-220.47,-125.98) M2(-188.98,-125.98) M3(-157.48,-125.98) M4(-125.98,-125.98) M5(-94.49,-125.98) M6(-62.99,-125.98) M7(-31.5,-125.98) M8(0,-125.98) M9(31.5,-125.98) M10(62.99,-125.98) M11(94.49,-125.98) M12(125.98,-125.98) M13(157.48,-125.98) M14(188.98,-125.98) M15(220.47,-125.98) N1(-220.47,-157.48) N2(-188.98,-157.48) N3(-157.48,-157.48) N4(-125.98,-157.48) N5(-94.49,-157.48) N6(-62.99,-157.48) N7(-31.5,-157.48) N8(0,-157.48) N9(31.5,-157.48) N10(62.99,-157.48) N11(94.49,-157.48) N12(125.98,-157.48) N13(157.48,-157.48) N14(188.98,-157.48) N15(220.47,-157.48) P1(-220.47,-188.98) P2(-188.98,-188.98) P3(-157.48,-188.98) P4(-125.98,-188.98) P5(-94.49,-188.98) P6(-62.99,-188.98) P7(-31.5,-188.98) P8(0,-188.98) P9(31.5,-188.98) P10(62.99,-188.98) P11(94.49,-188.98) P12(125.98,-188.98) P13(157.48,-188.98) P14(188.98,-188.98) P15(220.47,-188.98) R1(-220.47,-220.47) R2(-188.98,-220.47) R3(-157.48,-220.47) R4(-125.98,-220.47) R5(-94.49,-220.47) R6(-62.99,-220.47) R7(-31.5,-220.47) R8(0,-220.47) R9(31.5,-220.47) R10(62.99,-220.47) R11(94.49,-220.47) R12(125.98,-220.47) R13(157.48,-220.47) R14(188.98,-220.47) R15(220.47,-220.47)
  silkscreen extent -269,-269 269,269, body extent 0,0 10,10, height 10

## Part data
C1_U_BNO0551 C1_U_BNO0552 C2_U_BNO0551 C2_U_BNO0552 C3_U_BNO0551 C3_U_BNO0552 C4_U_BNO0551 C4_U_BNO0552 C5 C6 C7 C8 C9 C10 C11 C12 C13 C14 C15 C16 C17 C18 C19 C20 C21 C22 C23 C24 C25 C26 C27 C28 C29 C30 C31 C32 C33 C34 C35 C36 C37 C38 C40 C41 C42 C49 C145 C146 C167 C168: "Capacitor", LatestRevisionDate=17-Jul-2002, LatestRevisionNote="Re-released for DXP Platform.", PackageDescription="Radial Cap, Thru-Hole; 2 Leads; 0.3 in Pin Spacing", PackageReference=RAD-0.3, Published=8-Jun-2000, Publisher="Altium Limited"
C39 C43 C44 C45 C46 C47 C48 C50 C51 C52 C53 C54 C142: "Capacitor", Supplier Part Number 1=490-3295-1-ND, LatestRevisionDate=17-Jul-2002, LatestRevisionNote="Re-released for DXP Platform.", PackageDescription="Radial Cap, Thru-Hole; 2 Leads; 0.3 in Pin Spacing", PackageReference=RAD-0.3, Published=8-Jun-2000, Publisher="Altium Limited", Supplier 1=Digi-Key
J14 J15 J16 SW1 U2 U7: "No Description Available", Copyright="Copyright (C) 2018 Accelerated Designs. All rights reserved", RefDes=RefDes, Type=DEV
  J14 J15 J16: Built_By=EMA_Cory, Manufacturer_Part_Number=OSTTC022162, SourceLibrary=On_Shore_Technology_2019-12-02, Vendor="On Shore Technology Inc"
  SW1: Built_By=EMA_Cory, Datasheet=https://www.ckswitches.com/media/2567/pts647.pdf, Manufacturer_Part_Number=PTS647SK38SMTR2LFS, SourceLibrary=C&K_2020-05-06, Vendor=C&K
  U2: Built_By=EMA_Jessica, Manufacturer_Part_Number=STM32F750N8H6, SourceLibrary=Add_to_database_2020-10-19, Vendor=STMicroelectronics
  U7: Built_By=EMA_UL_Team, Manufacturer_Part_Number=D5V0L2B3W-7, SourceLibrary=DIODESINC_2_2015-08-18, Vendor="Diodes Inc"
P1: "Header, 4-Pin, Dual row", LatestRevisionDate=17-Jul-2002, LatestRevisionNote="Re-released for DXP Platform.", Publisher="Altium Limited"
P1: "Header, 2-Pin", LatestRevisionDate=17-Jul-2002, LatestRevisionNote="Re-released for DXP Platform.", Publisher="Altium Limited"
P2: library part CMP-2000-05353-1, "Male Header, Pitch 1.27 mm, 2 x 5 Position, Height 6.25 mm", Color=Black, Manufacturer=Samtec, Package Description="Male Header, Pitch 1.27 mm, 2 x 5 Position, Height 5.97 mm, Tail Length 4.32 mm", Package Reference=FTSH-105-01-L-DV-K, Standard Package=1, Category=Connectors,Interconnects, Connector Type=Header,Unshrouded, Contact Finish=Gold, Contact Finish Thickness=10µin(0.25µm), Contact Mating Length="0.120\"(3.05mm)", Contact Type=MalePin, Datasheet URL=http://suddendocs.samtec.com/prints/ftsh-1xx-xx-xxx-dv-xxx-mkt.pdf, Datasheet Version="Rev. ET, 10/1995", Family=RectangularConnectors-Headers,MalePins, Manufacturer URL=http://www.samtec.com/, Mating Products="SFMC-105-L2-S-D-TR-ND / -CONN.05\"SURFACE10POSSMT / FLE-105-01-G-DV-TR-ND / -CONNSKT1.27MM10POSDUALSMD / FLE-105-01-G-DV-A-P-ND / -CONNSKT1.27MM10POSDUALSMD / FLE-105-01-G-DV-A-ND / -CONNSKT1.27MM10POSDUALSMD / CLP-105-02-G-D-P-TR-ND / -CONNRCPT10POSDUAL.05\"SMD / SAM1155-05-ND / -CONNRCPT10POSDUAL.05\"SMD / SAM1154-05-ND / -CONNRCPT10POSDUAL.05\"SMD / SAM1153-05-ND / -CONNRCPT10POSDUAL.05\"SMD / SAM1226-05-ND / -CONNRCPT.05\"10POSDUALSMD", Mounting Type=SurfaceMount, Number of Positions=10, Number of Positions Loaded=All, Number of Rows=2, Other Names=Q3937619, Package URL=http://suddendocs.samtec.com/prints/ftsh-1xx-xx-xxx-dv-xxx-footprint.pdf, Packaging=Tube, Pitch="0.050\"(1.27mm)", Product Training Modules=Board-to-BoardConnectors, Row Spacing="0.050\"(1.27mm)", Series=FTSH, Termination=Solder
R1 R2 R3 R4 R4_U_BNO0551 R4_U_BNO0552 R5 R5_U_BNO0551 R5_U_BNO0552 R6 R7 R8 R9 R10 R11 R12 R13 R13-16 R14 R15 R16 R17 R18 R19 R20 R21 R22 R43 R44 R45 R46 R51 R52: "Resistor", LatestRevisionDate=17-Jul-2002, LatestRevisionNote="Re-released for DXP Platform.", PackageDescription="Axial Device, Thru-Hole; 2 Leads; 0.3 in Pin Spacing", PackageReference=AXIAL-0.3, Published=8-Jun-2000, Publisher="Altium Limited"
U1_U_BNO0551 U1_U_BNO0552: library part CMP-191067-000002-1, "IMU ACCEL/GYRO/MAG I2C 28LGA", Ambient Temperature Range High=+85°C, Ambient Temperature Range Low=-40°C, Manufacturer="Bosch Sensortech", Max Supply Voltage=3.6V, Min Supply Voltage=1.7V, Operating Supply Current=12.3mA, Package=0, Temperature="-40°C to +85°C", Voltage=1.7~3.6V, Accel Range=2/4/8/16g, Accel Resolution=14bits, Accel Sensitivity=0.001LSB/g, Automotive=No, Category=IC, ComponentLink2Description=Datasheet, ComponentLink2URL=https://ae-bst.resource.bosch.com/media/_tech/media/datasheets/BST-BNO055-DS000.pdf, Device Class L1=Sensors, Device Class L2="Motion Sensors", Device Class L3="Inertial Measurement Units (IMUs)", Digikey Description="IMU ACCEL/GYRO/MAG I2C 28LGA", Gyro Range=125/250/500/1000/2000°/s, Gyro Sensitivity=16LSB/°/s, Height=1.18mm, Lead Free=Yes, Mag Sense Range=1300-2500uT, Manufacturer Part Number=BNO055, Mouser Description="BNO055 Series 1.7 to 3.6 V Intelligent 9-Axis Absolute Orientation Sensor-LGA-28", Octopart=https://octopart.com/bno055-bosch+sensortec-50309911, RoHS=TRUE, Sensor Output=I2C,UART, Sensor Type=Accelerometer,Gyroscope,Magnetometer, Temperature Range High=+85°C, Temperature Range Low=-40°C
U3: "No Description Available", Mfr_Name=Microchip, Copyright="Copyright (C) 2021 Ultra Librarian. All rights reserved.", Digi-Key_Part_Number_1=LAN8700C-AEZG-CT-ND, Digi-Key_Part_Number_2=LAN8700C-AEZG-DKR-ND, Digi-Key_Part_Number_3=LAN8700C-AEZG-TR-ND, Manufacturer_Part_Number=LAN8700C-AEZG-TR, RefDes=RefDes, Type=DEV
U6: "No Description Available", Manufacturer="Texas Instruments", Copyright="Copyright (C) 2018 Accelerated Designs. All rights reserved", PartNumber=TCAN334DR, RefDes=RefDes, Type=DEV
U15: library part CMP-2000-06431-1, "Telecom Transformer 1:1/1:1, -40 to 85 degC, 16-Pin SMT, RoHS, Tube", Manufacturer="Pulse Electronics", Package Description="16-Pin Surface Mount Device, Body 12.7 x 9.09 mm, Pitch 1.27 mm", Package Reference=SMT, Standard Package=40, Category=Transformers, Datasheet URL=http://productfinder.pulseeng.com/products/datasheets/HX1188FNL.pdf;jsessionid=D0CB5525A348FF42F5E5BE320CB10324, Datasheet Version="Rev. B, 05/2014", Family=PulseTransformers, Height - Seated (Max)=5.99mm, Manufacturer URL=http://www.pulseelectronics.com/, Mounting Technology=SurfaceMount, Mounting Type=SurfaceMount, Online Catalog=HX1188, Other Names=553-2200, Other Related Documents=PackagesFNLvs.NL, PartNumber=HX1188FNL, Size / Dimension=12.70mmLx9.00mmW, Transformer Type=IsolationandDataInterface(Encapsulated), Turns Ratio - Primary=Secondary:1:1Transmitter,1:1Receiver
U25: library part CMP-04948-000003-1, "LOW-POWER HIGH-ACCURACY ANALOG O", Ambient Temperature Range High=+150°C, Ambient Temperature Range Low=-40°C, Manufacturer="Texas Instruments", Manufacturer Part Number=TMP235A2DBZR, Max Supply Voltage=5.5V, Min Supply Voltage=2.3V, Operating Supply Current=9uA, Output Current=500uA, Package=DBZ0003A, Temperature="-40°C to +150°C", Accuracy=0.5%, Automotive=No, Category=IC, ComponentLink2Description=Datasheet, ComponentLink2URL=http://www.ti.com/lit/ds/symlink/tmp235.pdf, Device Class L1=Sensors, Device Class L2="Temperature and Humidity Sensors", Device Class L3=unset, Digikey Description="LOW-POWER HIGH-ACCURACY ANALOG O", Height=1.12mm, Lead Free=Yes, Max Junction Temp=+150°C, Mouser Description="±2°C Analog output temperature sensor, with 10mV /°C gain 3-SOT-23 -40 to 150", Octopart=https://octopart.com/tmp235a2dbzr-texas+instruments-94966376, RoHS=TRUE, Sensor Output="Analog Voltage", Standoff Height=0.01mm, Temperature Range High=+150°C, Temperature Range Low=-40°C
D1 D2 D3 D4 D5 D6 D7 D8 D9 D9-D12 D10 D11 D12 D13 D14: LatestRevisionDate=08-Jul-2005, LatestRevisionNote="Mech Layer 1 removed.", PackageDescription="LED; 2 Leads", PackageReference=LED-0, Published=8-Jun-2000, Publisher="Altium Limited"
J1: Supplier 1=Mouser
L1 L2 L3: Code_IEC=1005, Code_JEITA=0402, LatestRevisionDate=29-May-2009, LatestRevisionNote="IPC-7351 Footprint Added.", PackageDescription="Chip Inductor", PackageReference=0402-A, Published=8-Jun-2000, Publisher="Altium Limited"

## Free pads (board coordinates)
  round 130 hole 130 unplated: 5(175.5,2964.5) 6(175.5,564.5) 7(4575.5,564.5) 8(4575.5,2964.5)

## Via types
v1: diameter 30, hole 15, Top Layer to Bottom Layer, 352 vias
v2: diameter 18, hole 8, Top Layer to Bottom Layer, 148 vias
v3: diameter 17.72, hole 7.87, Top Layer to Bottom Layer, 27 vias
v4: diameter 18, hole 10, Top Layer to Bottom Layer, 1 vias

## Nets (pads, with @x,y where several pads share a name; then routed paths per layer and width w, separated by ;. In a path a pad name is that pad's centre, name@x,y a point inside that pad or via, vN(x,y) a via of type N, cw(c..) or ccw(c..) an arc to the next point about the centre after c; other vN are vias at no path point)
1V8: J1.0 J14.1 J19.1 R3.2 | length 972.9
  Top Layer w5: 821,3134.59 978.03,2977.56 R3.2@980,2977.56
  Top Layer w15: J14.1@515,2945 770,2945 821,2996 821,3134.59 821,3251 J1.0@821,3417.75
3V3: C1_U_BNO0551.2 C1_U_BNO0552.2 C3_U_BNO0551.2 C3_U_BNO0552.2 C4_U_BNO0551.2 C4_U_BNO0552.2 C6.2 C7.2 C8.2 C9.2 C10.2 C11.2 C12.2 C13.2 C14.2 C15.2 C16.2 C17.2 C18.2 C19.2 C20.2 C21.2 C22.2 C23.2 C24.2 C27.2 C28.2 C30.2 C33.1 C34.2 C35.2 C36.2 C37.2 C38.2 C42.2 C43.1 C44.1 C46.1 C47.1 C48.1 C50.1 C168.1 D8.1 D9.1 D13.1 D14.1 J1.23 J12.1 J15.1 P2.1 R2.2 R4_U_BNO0551.1 R4_U_BNO0552.1 R5_U_BNO0551.2 R5_U_BNO0552.2 R10.1 R20.1 R21.1 R22.1 U1_U_BNO0551.3 U1_U_BNO0551.5 U1_U_BNO0551.28 U1_U_BNO0552.3 U1_U_BNO0552.5 U1_U_BNO0552.28 U2.C1 U2.E7 U2.E8 U2.E9 U2.E10 U2.F4 U2.F5 U2.F11 U2.G5 U2.G11 U2.H5 U2.H11 U2.J5 U2.J11 U2.K5 U2.K11 U2.L7 U2.L8 U2.L9 U2.L10 U2.P1 U2.R1 U3.7 U3.25 U3.30 U3.33 U3.35 U4.8 U4.12 U6.3 U25.1 | length 5628.1
  Top Layer w5: R2.2@1050,2977.56 v2(1050,3020) ; v2(1795,1545) U3.33@1838,1545 ; v2(1800,1505) U3.35@1838,1505 ; v2(1800,1610) 1803.52,1610 1808.52,1605 U3.30@1838,1605 ; U3.25@1910,1677 1910,1721.48 ; v2(1990,1380) U3.7@1990,1453 ; D8.1@2020,1212.44 D9.1@2070,1212.44 D13.1@2125,1212.44 D14.1@2175,1212.44 2212.56,1212.44 v2@2215,1210 ; C37.2@2650,1440.31 2687.74,1440.31 2687.74,1435.61 2710.86,1412.49 2717.51,1412.49 v2(2720,1410) ; U2.R1@2816.54,1415.51 2729.03,1415.51 2723.52,1410 v2(2720,1410) ; U2.P1@2816.54,1447.01 2726.69,1447.01 C38.2@2720,1440.31 v2(2720,1410) ; v2(2895,1588.75) 2926.76,1588.75 U2.K5@2942.52,1572.99 ; v2(2895.25,1651.5) 2926.54,1651.5 ; v2(2895.28,1745.83) 2895.28,1719.72 2900.05,1714.95 2927,1714.95 ; U2.F4@2911.02,1698.98 2927,1714.95 ; 2926.78,1588.75 U2.J5@2942.52,1604.49 ; U2.H5@2942.52,1635.98 2927,1651.5 2926.54,1651.5 ; U2.G5@2942.52,1667.48 2926.54,1651.5 ; U2.F5@2942.52,1698.98 2927,1714.5 2927,1714.95 ; U2.L7@3005.51,1541.5 3020.87,1526.13 3020.87,1525.36 ; U2.E7@3005.51,1730.47 3021.01,1745.97 ; v2(3020.88,1494.25) 3020.87,1525.36 ; v2(3021.26,1778.1) 3021.26,1746.22 U2.E8@3037.01,1730.47 ; R10.1@3024.68,1145 v2(3075,1145) ; U2.L8@3037.01,1541.5 3020.87,1525.36 ; U2.L9@3068.5,1541.5 3084.64,1525.36 ; U2.E9@3068.5,1730.47 3084.25,1746.22 ; 3084,1743.99 3084,1744.51 ; v2(3084.25,1778.1) 3084.25,1746.22 ; v2(3084.64,1494.25) 3084.64,1525.36 ; U2.L10@3100,1541.5 3084.64,1526.13 3084.64,1525.36 ; U2.E10@3100,1730.47 3084.25,1746.22 ; U2.K11@3131.5,1572.99 U2.J11@3131.5,1604.49 3147.63,1620.62 v2(3178.74,1620.62) ; U2.H11@3131.5,1635.98 3147.51,1652 ; U2.F11@3131.5,1698.98 U2.G11@3131.5,1667.48 3146.98,1652 3147.51,1652 ; P2.1@3275,2410.24 3275,2442.93 3287.07,2455 v2@3325,2455 ; C35.2@3367.44,1655 3362.44,1650 3269.49,1650 3267.49,1652 v2(3178.75,1652) 3147.51,1652 ; v2(4010,1570) 4039.68,1570 R5_U_BNO0551.2@4040,1569.69 ; v2(4050,2115) 4055,2110 R5_U_BNO0552.2@4055,2074.69 R5_U_BNO0552.2@4054.68,2075 ; C3_U_BNO0551.2@4099.69,1220 C4_U_BNO0551.2@4099.69,1260 4099.69,1305.91 4118.9,1325.12 U1_U_BNO0551.28@4118.9,1333.48 4118.9,1341.85 4131.1,1354.05 4155.05,1354.05 4155.72,1354.72 4159.86,1354.72 4179.58,1335 v2(4240,1335) 4240,1364.69 C1_U_BNO0551.2@4239.69,1365 4239.69,1385 ; J12.1@4100,865 4117.5,865 4205,777.5 J15.1@4205,620 ; C3_U_BNO0552.2@4129.69,1710 C4_U_BNO0552.2@4129.69,1755 ; C4_U_BNO0552.2@4130.82,1755 4135,1759.18 v2(4135,1795) 4136.56,1796.56 4136.56,1834.21 4137.84,1835.49 U1_U_BNO0552.28@4138.11,1835.49 ; U1_U_BNO0551.3@4141.04,1385.16 4141.2,1385 4239.69,1385 ; U1_U_BNO0551.5@4141.04,1424.53 4159.86,1424.53 4185.33,1450 v2@4230,1450 ; U1_U_BNO0552.3@4156.04,1895.16 4156.2,1895 4249.69,1895 ; U1_U_BNO0552.5@4162.44,1934.53 4177.91,1950 v2(4225,1950) ; R4_U_BNO0551.1@4239.69,1410 4239.69,1385 ; C1_U_BNO0552.2@4249.69,1870 4249.69,1895 ; R4_U_BNO0552.1@4249.69,1920 4249.69,1895 ; v2(4280,1895) 4249.69,1895
  Top Layer w10: C33.1@1940,2477.56 1941.97,2477.56 1963.47,2499.06 1963.47,2503.47 v2(1965,2505) 1966.53,2503.47 1966.53,2499.06 1988.03,2477.56 C34.2@1990,2477.56 2067.64,2477.56 2085.08,2495 2144.14,2495 2165,2474.14 U6.3@2165,2417.72 ; v2(2360,2915) C168.1@2405.32,2915 ; v2(2405,2715) 2405,2776.06 U25.1@2407.6,2778.66 ; v2(2705,2800) 2705.16,2799.84 2744.84,2799.84 C27.2@2745,2799.69 C28.2@2790,2799.69 2790.69,2799 2864.31,2799 U4.8@2865,2798.31 U4.8@2863.22,2796.53 ; v2(2745,1792) 2745.73,1792.73 2815.8,1792.73 U2.C1@2816.54,1793.46 ; v2(2895,2525) C30.2@2930.31,2525 2928.96,2526.36 2928.96,2596.16 U4.12@2927.6,2597.52
  Bottom Layer w5: v2(1795,1545) C44.1@1835.32,1545 ; v2(1800,1505) 1803.52,1505 1806.18,1502.34 1827.66,1502.34 C50.1@1835,1495 ; v2(1800,1610) C47.1@1835.32,1610 ; C43.1@1880,1727.56 1882.44,1730 v2(1915,1730) 1917.49,1727.51 1924.46,1727.51 1940,1711.97 C48.1@1940,1710 ; C46.1@1980,1445 1987.34,1437.66 1987.34,1386.18 1990,1383.52 v2(1990,1380) ; R20.1@2445,1500.32 R21.1@2480,1500.32 R22.1@2515,1500.32 2544.68,1500.32 v2(2545,1500) ; v2(2895.28,1745.83) 2897.83,1745.83 2938.66,1705 C23.2@2940.63,1705 ; 2900,1737.59 C14.2@2900,1715 2900,1685.63 C15.2@2899.37,1685 2895.25,1680.88 v2(2895.25,1651.5) ; C24.2@2936.06,1570.75 C24.2@2940.31,1575 2908.75,1575 v2(2895,1588.75) 2916.25,1610 C21.2@2940.31,1610 ; C22.2@2940.31,1640 2907.08,1640 2895.58,1651.5 v2(2895.25,1651.5) ; C16.2@2940.31,1670 2913.75,1670 v2(2895.25,1651.5) ; C19.2@3020,1535.31 3021,1534.31 3021,1494.38 v2(3020.88,1494.25) ; C18.2@3020,1739.69 3025,1734.69 3043.03,1734.69 C6.2@3050,1741.65 ; v2(3021.26,1778.1) 3043.71,1755.65 3043.71,1745.98 C6.2@3050,1739.69 ; 3023.36,1507.02 3050,1533.66 C17.2@3050,1535.63 C20.2@3085,1535.63 3085,1495 v2@3085.19,1494.81 ; C7.2@3080,1739.69 3084.25,1743.94 v2(3084.25,1778.1) 3086.74,1775.61 3086.74,1769.91 3115,1741.65 C11.2@3115,1739.69 ; v2(3084.64,1494.25) v2@3085.19,1494.81 ; C11.2@3110,1744.69 C11.2@3114.69,1740 ; C13.2@3115,1535.31 3109.32,1529.63 3109.32,1518.93 v2@3085.19,1494.81 ; C42.2@3145,1700.31 3145,1669.69 C10.2@3149.69,1665 3157.03,1657.66 3169.57,1657.66 v2@3175.23,1652 ; C8.2@3149.37,1605 3156.71,1612.34 3166.95,1612.34 3175.22,1620.62 v2(3178.74,1620.62) 3178.74,1618.41 3189.69,1607.46 C12.2@3189.69,1570 ; C9.2@3149.69,1635 3157.03,1642.34 3165.57,1642.34 v2@3175.23,1652 ; v2(3178.75,1652) v2@3175.23,1652
  Bottom Layer w200: v2(1220,3125) 1230.32,3114.68 1295,3114.68 1295,3408.75 1294,3409.75 J1.23@1294,3417.75
  other v2: 2215,1209.01 4100,1295 4228.5,1449.55 3320,2455 1245,3055 1335,3070 1175,3095 1360,3105 1335,3135 1365,3145 1270,3160
5V0: J1.1 J10.1 J16.1 R1.2 | length 1786.1
  Top Layer w5: R1.2@1125,2977.56 1126.97,2977.56 1294,3144.59
  Top Layer w15: J16.1@515,2380 835,2380 1294,2839 1294,3144.59 J1.1@1294,3417.75
ANT_I: C25.2 U4.4 | length 115.9
  Top Layer w10: C25.2@2755,2957.56 2756.97,2957.56 2771.1,2971.69 U4.4@2865,2971.69
ANT_O: C25.1 U4.6 | length 117.2
  Top Layer w10: C25.1@2755,2902.44 2756.97,2902.44 2774.41,2885 U4.6@2865,2885
BNORX: U1_U_BNO0552.20 U2.D15 | length 752.7
  Top Layer w5: U2.D15@3257.48,1761.97 3894.9,1761.97 U1_U_BNO0552.20@3976.42,1843.48
BNORX1: U1_U_BNO0551.20 U2.L14 | length 825.7
  Top Layer w5: U2.L14@3225.98,1541.5 3242.48,1525 3261.49,1525 3266.49,1530 3722.92,1530 3919.43,1333.48 U1_U_BNO0551.20@3961.42,1333.48
BNOTX: U1_U_BNO0552.19 U2.E15 | length 819.4
  Top Layer w5: U2.E15@3257.48,1730.47 3242.98,1744.97 3242.98,1767.97 3252.72,1777.72 3262.24,1777.72 3271.98,1787.46 3271.98,1788.1 3288.88,1805 3815.65,1805 3885.22,1874.57 3973.05,1874.57 U1_U_BNO0552.19@3973.96,1875.47
BNOTX1: U1_U_BNO0551.19 U2.L15 | length 774.4
  Top Layer w5: U2.L15@3257.48,1541.5 3258.98,1540 3725.65,1540 3900.17,1365.47 U1_U_BNO0551.19@3958.96,1365.47
Boot0: P1.1@2795,2330 U2.E6 | length 673.7
  Top Layer w5: v2(2960,1745) 2960,1744.74 2974.02,1730.73 U2.E6@2974.02,1730.47
  Bottom Layer w5: P1.1@2795,2330 2822.03,2302.97 2960,2165 v2(2960,1745)
CANH: C31.2 J1.21 J8.1 P1.7 U6.7 U7.1 | length 1266.7
  Top Layer w5: P1.7@1670,3000 1800,3000 J8.1@1805,3005 1930,3005 2113.72,3005 ; C31.2@2112.44,2735.12 U7.1@2112.44,2824.57 ; U7.1@2113.72,2825.85 2113.72,3005 ; U6.7@2115,2632.28 C31.2@2115,2732.56 ; v2(2115,3025) 2113.72,3023.72 2113.72,3005 ; v2@2195,3131.08 2195,3217.32 2195.66,3217.98 2195.66,3410.41 J1.21@2203,3417.75
  Top Layer w10: C31.2@2112.44,2735.12 C31.2@2115,2732.56 ; U7.1@2112.44,2824.57 U7.1@2113.72,2825.85
  Bottom Layer w5: v2(2115,3025) 2115,3055 v2(2190,3130)
CANL: C32.2 J1.20 J9.1 P1.5 U6.6 U7.2 | length 1319.7
  Top Layer w5: P1.5@1670,2900 2017.22,2900 v2(2097.22,2980) ; v2(2163.47,3073.47) 2164.16,3074.16 2164.16,3410.41 J1.20@2171.5,3417.75 ; U6.6@2165,2632.28 C32.2@2165,2732.56 ; U7.2@2166.28,2825.85 v2@2166.28,2978.72 ; C32.2@2167.56,2735.12 U7.2@2167.56,2824.57
  Top Layer w10: C32.2@2165,2732.56 C32.2@2167.44,2735 C32.2@2167.56,2735.12 ; v2(2165,2980) v2@2166.28,2978.72 ; U7.2@2166.28,2825.85 U7.2@2167.56,2824.57
  Bottom Layer w5: v2(2097.22,2980) v2@2163.13,2980 ; v2(2163.47,3073.47) 2163.75,3073.19 2163.75,2981.25 v2(2165,2980)
  Bottom Layer w10: v2@2163.13,2980 v2(2165,2980)
CANRX: U2.A7 U6.4 | length 1045.5
  Top Layer w5: U6.4@2215,2417.72 2215,2412.09 2223.6,2403.48 2301.06,2403.48 2672.04,2032.5 2745.23,2032.5 2878.36,1899.37 2885.63,1899.37 2914.04,1870.96 2917.03,1870.96 2925.52,1862.46 2925.52,1859.48 2925.71,1859.29 2925.71,1853.41 2928.02,1851.1 2928.02,1850.45 2938.47,1840 2980,1840 2995.02,1855.02 3004.08,1855.02 U2.A7@3005.51,1856.46
CANTX: U2.B4 U6.1 | length 1114.3
  Top Layer w5: U6.1@2065,2417.72 2065,2407.94 2073.6,2399.34 2080.66,2399.34 2130,2350 2286.67,2350 2745.85,1890.83 2874.17,1890.83 2895,1870 2895,1845 2907.07,1832.93 2907.07,1831.89 2911.02,1827.94 U2.B4@2911.02,1824.96
CGND: C142.2 C145.2 C146.2 J4.9 J4.10 R51.1 | length 725.8
  Top Layer w4: v3(900,1650) 920,1670 C145.2@955.31,1670
  Top Layer w5: C142.2@1239.69,1325 1350,1325 ; J4.10@1370,860 1364.77,865.23 1364.77,1227.07 1367.7,1230 ; C146.2@1395,1320 1390,1325 1350,1325 ; R51.1@1396.85,1230 1367.7,1230 ; 1350,1325 v2(1350,1275) 1350,1247.7 1367.7,1230
  other v3: 750,450 825,600 1275,600 750,750 825,900 1275,900 750,1050 900,1050 1050,1050 1200,1050 1350,1050 825,1200 975,1200 1275,1200 750,1350 900,1350 1200,1350 1350,1350 825,1500 1275,1500 750,1650 1050,1650 1350,1650 825,1800 975,1800 1275,1800
COL: U2.R2 U3.36 | length 1738.7
  Top Layer w5: U3.36@1838,1485 1837.5,1485 1835,1482.5 1835,1190 1978.54,1046.46 2843.54,1046.46 v2(2845,1045) ; U2.R2@2848.03,1415.51 2848.21,1415.33 2848.21,1396.68 v2(2848.4,1396.5)
  Bottom Layer w5: v2(2845,1045) 2846.7,1046.7 2846.7,1394.8 v2(2848.4,1396.5)
CRS: U2.N3 U3.3 | length 1706.4
  Top Layer w5: U3.3@1910,1453 1910,1150 1958.5,1101.5 v2(2880,1101.5) ; v2(2868.34,1486.96) 2869.71,1486.96 2878.16,1478.5 U2.N3@2879.53,1478.5
  Bottom Layer w5: v2(2868.34,1486.96) 2890,1465.3 2890,1114.83 2880,1104.83 v2(2880,1101.5)